# Altium PCB USB-2-RTMI.PcbDoc
Units mil, origin at the board's own origin, x right, y up, seen from the top; angles counter-clockwise.
Board outline 2555 x 900 mil, 2 copper layers (Top Layer, Bottom Layer); 22 components, 25 nets, 113 pads, 16 vias.
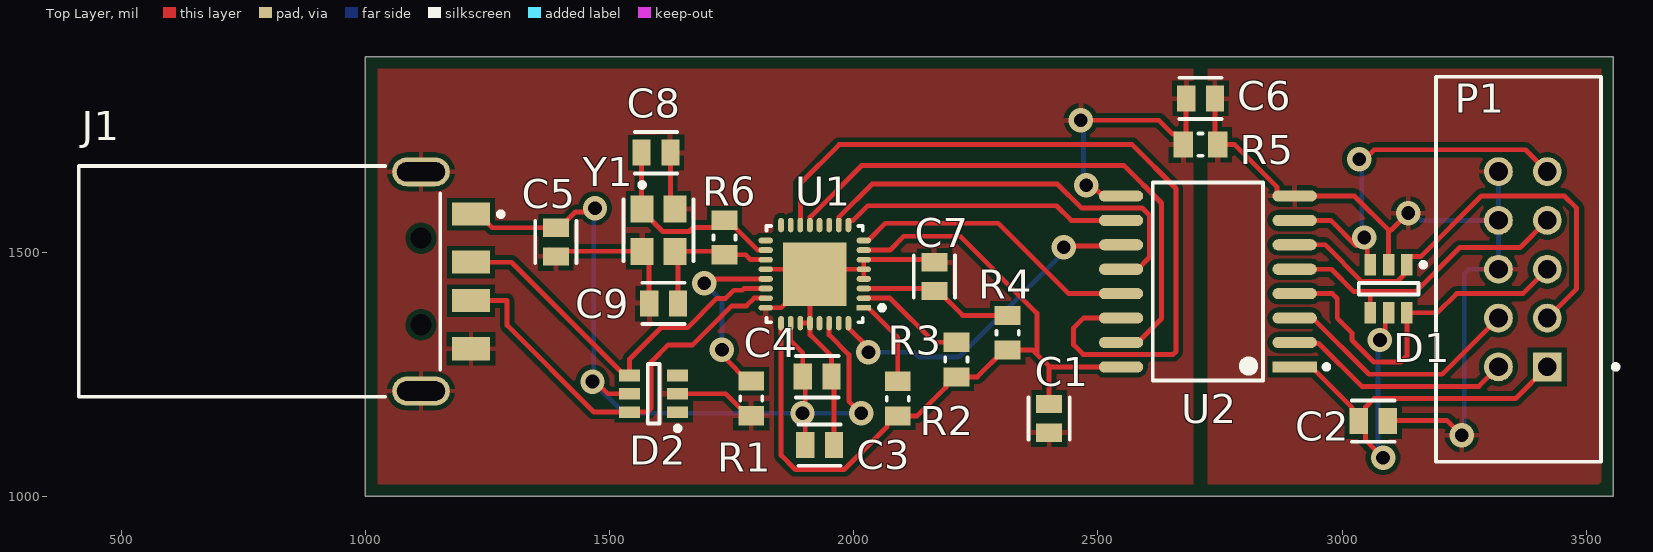
[diagram p0: Top Layer view]
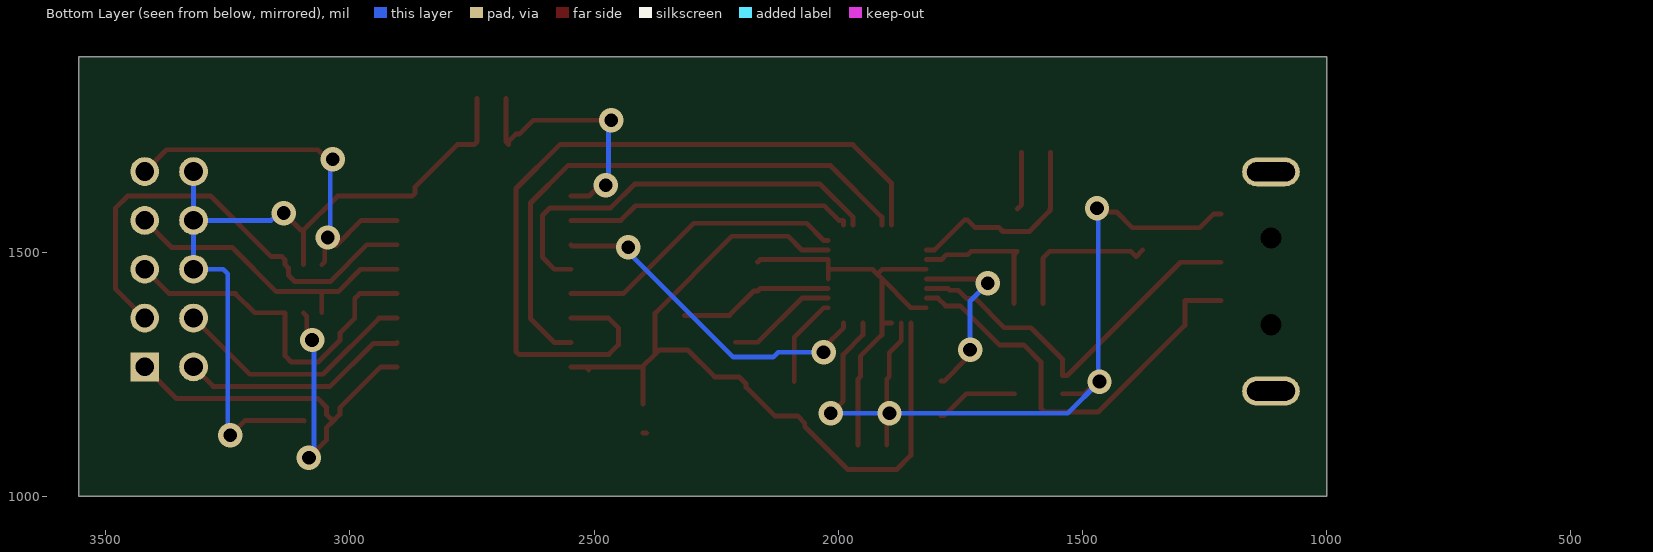
[diagram p1: Bottom Layer view, seen from below]
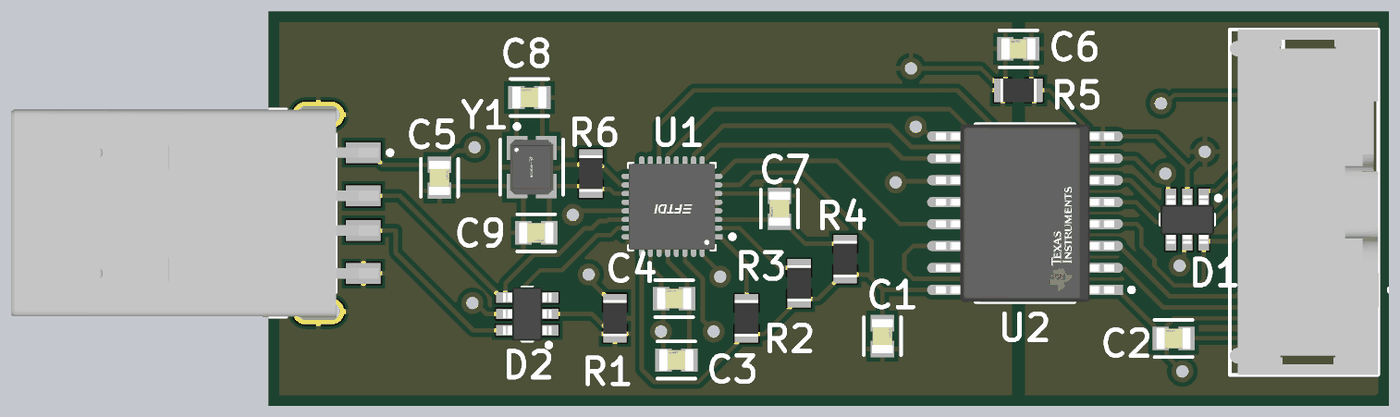
[diagram p2: 3D render of the assembled board from above, using the file's embedded part models]

## Layer stack, top to bottom
Top Solder: solder mask 0.4, Solder Resist, Dk 3.5
Top Layer: signal copper 1.4
Dielectric 1: dielectric 12.6, FR-4, Dk 4.8
Bottom Layer: signal copper 1.4
Bottom Solder: solder mask 0.4, Solder Resist, Dk 3.5

## Board outline
1000,1000 1000,1900 3555,1900 3555,1000

## Design rules (kind name [scope] priority, off if disabled: settings)
Clearance [All] p1: gap=10 ignorepadtopadclearanceinfootprint=TRUE except(0: Arc-Hole Track-Hole SMDPad-Hole THPad-Hole Via-Hole Fill-Hole Poly-Hole Region-Hole Text-Hole; 8: Arc-Arc Arc-Track Arc-SMDPad Track-Track Track-SMDPad SMDPad-SMDPad)
PolygonConnect [All] p1: connectstyle=Relief reliefconductorwidth=10 reliefentries=4 polygonreliefangle="90 Angle" airgapwidth=10
RoutingVias [All] p1: holewidth=28 width=50 viastyle="Through Hole" minholewidth=28 minwidth=50 maxholewidth=28 maxwidth=50
SolderMaskExpansion [All] p1: expansion=4 istentingtop=FALSE
Width [All] p1: maxlimit=10 minlimit=10 preferedwidth=10
30 further rules are at their usual default settings.

## Components (designator, comment, footprint, x,y, rotation, side; value= is the part's Value field where it differs from the comment)
C1 "100nF" FP-C0805C-DN-MFG 2400,1159.53 r270 top value="0.10 μF"
C2 "100nF" FP-C0805C-DN-MFG 3063.7,1154.17 r0 top value="0.10 μF"
C3 "100nF" FP-C0805C-DN-MFG 1930,1105 r0 top value="0.10 μF"
C4 "4.7uF" FP-C0805C-DN-MFG 1925,1245 r0 top value="0.10 μF"
C5 "10nF" FP-C0805C-DN-MFG 1390,1520.47 r270 top value="0.10 μF"
C6 "100nF" FP-C0805C-DN-MFG 2710,1814.66 r0 top value="0.10 μF"
C7 "470nF" FP-C0805C-DN-MFG 2165,1450 r90 top value="0.10 μF"
C8 "12p" FP-C0805C-DN-MFG 1595,1703.63 r0 top value="0.10 μF"
C9 "12p" FP-C0805C-DN-MFG 1610.47,1395 r180 top value="0.10 μF"
D1 "RClamp0504S.TCT" SEMT-SOT-23-6_V 3095,1425 r270 top
D2 "RClamp0504S.TCT" SEMT-SOT-23-6_V 1590,1210 r180 top
J1 "480-37-1000" MOLX-480-37-1000_V 1165,1440 r270 top
P1 "N2510-6002RB" 3M-N2510-6002-10_V 3370,1465 r90 top
R1 "12k" RESC2013X60X35NL10T20 1790,1200.43 r90 top
R2 "10k" RESC2013X60X35NL10T20 2090,1200 r270 top
R3 "10k" RESC2013X60X35NL10T20 2210,1280 r270 top
R4 "47k" RESC2013X60X35NL10T20 2315,1335 r270 top
R5 "1M" RESC2013X60X35NL10T20 2710,1720 r0 top
R6 "1M" RESC2013X60X35NL10T20 1735,1530 r270 top
U1 "FT4222HQ-D-R" FP-VQFN-32-MFG 1920,1455 r180 top
U2 "ISO6761DWR" FP-DW0016A-IPC_B 2725,1440 r180 top
Y1 "ABM8G-12.000MHZ-18-D2Y-T" FP-ABM8G-MFG 1600,1545 r270 top

## Footprints (in the part's own frame and the unit in brackets; to place one, negate y for a bottom-side part, rotate by r counter-clockwise, add the part's x,y. Pads: shape width x height; smd on the part's side, far side on the other; paste and mask are expansions set on the pad)
3M-N2510-6002-10_V [mm] "Header, 10-Leads, Body 20.02x8.59mm, Pitch 2.54mm"
  rect 1.5x1.5 hole 0.97: 1(-5.08,-1.27)
  round 1.5 hole 0.97: 2(-5.08,1.27) 3(-2.54,-1.27) 4(-2.54,1.27) 5(0,-1.27) 6(0,1.27) 7(2.54,-1.27) 8(2.54,1.27) 9(5.08,-1.27) 10(5.08,1.27)
  silkscreen extent -10.01,-4.95 10.01,4.52, body extent -10.01,-4.11 10.01,4.52, height 9.92
FP-ABM8G-MFG [mm]
  rect 1.4x1.2 smd paste+0 mask+0: 1(-1.1,-0.85) 2(1.1,-0.85) 3(1.1,0.85) 4(-1.1,0.85)
  silkscreen extent -2.47,-1.82 1.6,1.82, body extent -1.9,-1.55 1.9,1.55, height 0.25
FP-C0805C-DN-MFG [mm]
  rect 0.95x1.35 smd paste+0 mask+0: 1(-0.75,0) 2(0.75,0)
  silkscreen extent -1.1,-1.07 1.1,1.07, body extent -1.4,-0.85 1.4,0.85, height 0.25
FP-DW0016A-IPC_B [mil]
  rect 90.66x22.92 smd paste+0 mask+0: 1(-177.78,175)
  rrect100% 90.66x22.92 smd paste+0 mask+0: 2(-177.78,125) 3(-177.78,75) 4(-177.78,25) 5(-177.78,-25) 6(-177.78,-75) 7(-177.78,-125) 8(-177.78,-175) 9(177.78,-175) 10(177.78,-125) 11(177.78,-75) 12(177.78,-25) 13(177.78,25) 14(177.78,75) 15(177.78,125) 16(177.78,175)
  silkscreen extent -248,-203 113,203, body extent -233,-213 233,213, height 10
FP-VQFN-32-MFG [mm]
  rect 0.75x0.3 smd paste+0 mask+0: 1(-2.55,1.75)
  rrect100% 0.75x0.3 smd paste+0 mask+0: 2(-2.55,1.25) 3(-2.55,0.75) 4(-2.55,0.25) 5(-2.55,-0.25) 6(-2.55,-0.75) 7(-2.55,-1.25) 8(-2.55,-1.75) 17(2.55,-1.75) 18(2.55,-1.25) 19(2.55,-0.75) 20(2.55,-0.25) 21(2.55,0.25) 22(2.55,0.75) 23(2.55,1.25) 24(2.55,1.75)
  rrect100% 0.3x0.75 smd paste+0 mask+0: 9(-1.75,-2.55) 10(-1.25,-2.55) 11(-0.75,-2.55) 12(-0.25,-2.55) 13(0.25,-2.55) 14(0.75,-2.55) 15(1.25,-2.55) 16(1.75,-2.55) 25(1.75,2.55) 26(1.25,2.55) 27(0.75,2.55) 28(0.25,2.55) 29(-0.25,2.55) 30(-0.75,2.55) 31(-1.25,2.55) 32(-1.75,2.55)
  rect 3.3x3.3 smd paste+0 mask+0: 33(0,0)
  silkscreen extent -3.63,-2.5 2.5,2.5, body extent -3.03,-3.03 3.03,3.03, height 0.25
MOLX-480-37-1000_V [mm] "CONN, 4-Leads, Body 12x18.8mm"
  rect 1.2x2 smd: 1(-3.5,1.3) 2(-1,1.3) 3(1,1.3) 4(3.5,1.3)
  oval 1.5x3 hole 1 slot 2.5 at 90 deg: 5(-5.7,-1.3) 6(5.7,-1.3)
  round 0.5 hole 1.1 unplated: MH1(-2.25,-1.3) MH2(2.25,-1.3)
  silkscreen extent -6,-19.1 6,2.98, body extent -6.35,-19.08 6.35,2.2, height 3.07
RESC2013X60X35NL10T20 [mm] "Chip Resistor, 2-Leads, Body 2.1x1.35mm, IPC Medium Density"
  rect 1x1.35 smd: 1(-0.9,0) 2(0.9,0)
  silkscreen extent -0.1,-0.58 0.1,0.58, body extent -1.05,-0.68 1.05,0.67, height 0.6
SEMT-SOT-23-6_V [mm] "SOT23, 6-Leads, Body 3.1x1.75mm, Pitch 0.95mm"
  rect 1.1x0.6 smd: 1(-1.25,0.95) 2(-1.25,0) 3(-1.25,-0.95) 4(1.25,-0.95) 5(1.25,0) 6(1.25,0.95)
  silkscreen extent -1.37,-1.55 0.3,1.93, body extent -1.4,-1.55 1.4,1.55, height 1.45

## Part data
C1 C2 C3 C4 C5 C6 C7 C8 C9: library part CMP-2007-00279-2, "CAP CER 0.1UF 50V X7R 0805", Capacitance="0.10 μF", Manufacturer=KEMET, Manufacturer Part Number=C0805C104K5RACTU, Package=C0805C-DN, Temperature="-55°C to +125°C", Temperature Characteristic=X7R, Temperature Coefficient=30ppm/°C, Temperature Range High=+125°C, Temperature Range Low=-55°C, Tolerance=0.1, Voltage Rating="50 V", Automotive=No, Category=Cap, ComponentLink2Description=Datasheet, ComponentLink2URL=https://content.kemet.com/datasheets/KEM_C1003_C0G_SMD.pdf, Device Class L1="Passive Components", Device Class L2=Capacitors, Device Class L3="Ceramic Capacitors", Digikey Description="CAP CER 0.1UF 50V X7R 0805", Height=0.88mm, Ipc Land Pattern Name=CAPC200125X78, Lead Free=Yes, Material=Ceramic, Mouser Description="Cap Ceramic 0.1uF 50V X7R 10% SMD 2.0 x 1.2 mm 125 C Paper T/R", Octopart=https://octopart.com/c0805c104k5ractu-kemet-143926, RoHS=TRUE
D1 D2: library part CMP-2000-06976-1, "RailClamp@ Low Capacitance TVS Array, 5 V VRWM, -55 to 125 degC, 6-Pin SOT-23, RoHS, Tape and Reel", Capacitance Value=3pF, Clamping Voltage=25V, Leakage Current=3uA, Manufacturer=Semtech, Operating Temp Range=-55Cto125C, Operating Temperature Classification=Military, Operating Temperature Max Deg. C=125C, Operating Temperature Min Deg. C=-55C, Package / Case=SOT-23, Package Description="6-Pin Small Outline Transistor, Body 2.95 x 1.625 mm, Pitch 0.95 mm", Package Reference=SOT-23-6, Peak Pulse Current=6A, Peak Pulse Power Dissipation=150W, Reverse Breakdown Voltage=6V, Reverse Stand-off Voltage=5V, Test Current (It)=1mA, Clamping Voltage (Max)=25V, Configuration=Quad, Datasheet URL=http://www.semtech.com/images/datasheet/rclamp0504s.pdf, Datasheet Version=01/2008, Direction Type=Uni-Directional, Leakage Current (Max)=3uA, Manufacturer URL=http://www.semtech.com/, Mounting=SurfaceMount, Mounting Style=SurfaceMount, Mounting Technology=SurfaceMount, Number of  Elements=1, Packaging=TapeandReel, Pin Count=6, Polarity=Uni-Directional, Product Depth (mm)=1.6mm, Product Height (mm)=1.15mm, Product Length (mm)=2.9mm, Rad Hardened=No, Suppressor Type=DiodeArrays, Working Voltage=5V, Working Voltage (Max)=5V
J1: library part CMP-1676-00005-1, "Universal Serial Bus (USB) Shielded I/O Plug, Type A, Right Angle Connector, 1.5 A, -20 to 85 degC, 4-Pin SMD, RoHS, Tray", Case Code (Imperial)=0603, Case Code (Metric)=1608, Max Operating Temperature="155 degC", Min Operating Temperature="-55 degC", Package Quantity=5000, Power Rating="100 mW", Resistance="1 mohm", Tolerance=1%, Voltage Rating="50 V", Case\Package=0603, ComponentLink1Description="Manufacturer URL", ComponentLink1URL=http://www.molex.com/, ComponentLink2Description=Datasheet, ComponentLink2URL=http://www.molex.com/pdm_docs/sd/480371000_sd.pdf, DatasheetVersion="Rev. D, 06/2004", Height="0.45 mm", Length="1.6 mm", Mount="Surface Mount", PackageDescription="4-Pin Surface Mount Device, Body 12 x 18.8 mm", PackageReference=480-37-1000, Packaging="Tape and Reel", Pins=2, REACH SVHC="No SVHC", RoHSCompliant=true, Voltage Rating (DC)="50 V", Width="0.8 mm"
P1: library part CMP-2000-06794-1, "Male Header, Pitch 2.54 mm, 2 x 5 Postion, Height 9.91 mm, Tail Length 2.84 mm, -55 to 105 degC, RoHS, Bulk", Manufacturer=3M, Package Description="10-Pin Through Hole Device, Body 20.02 x 8.59 mm, Pitch 2.54 mm", Package Reference=N2510-6002-10, Package Version="Rev. M, 08/2014", PartNumber=N2510, Contact Plating=GoldOverNickel, Datasheet URL=https://datasheet.ciiva.com/11746/0900766b807b18da-11746957.pdf, Datasheet Version=05/2007, Gender=Male, Manufacturer URL=http://www.3m.com/, Mounting Technology=ThroughHole, No. of Positions=10, No. of Rows=2, Number of Contacts=10, Number of Rows=2, Orientation=Straight, Package URL=http://multimedia.3m.com/mws/media/330367O/3mtm-100-in-4-wall-hdr-rohs-lp-straightra-hitemp-ts0770.pdf, Packaging=Rail/Tube, Pitch=2.54mm, Rad Hard=No, Termination Method=Solder, Type=ShroudedHeader
R1 R2 R3 R4 R5 R6: library part CMP-1659-00013-4, "Chip Resistor, 10 KOhm, +/- 1%, 0.125 W, -55 to 155 degC, 0805 (2012 Metric), RoHS, Tape and Reel", Manufacturer=Yageo, Max Operating Temperature="155 degC", Min Operating Temperature="-55 degC", Package Quantity=5000, Voltage Rating="150 V", ComponentLink1Description="Manufacturer URL", ComponentLink1URL=http://www.yageo.com/, ComponentLink2Description=Datasheet, ComponentLink2URL=http://www.yageo.com/documents/recent/PYu-RC_Group_51_RoHS_L_04.pdf, DatasheetVersion="Rev. 4, 02/2016", Height="0.5 mm", Length="2 mm", Mount="Surface Mount", Mounting Technology="Surface Mount", PackageDescription="2-Pin Surface Mounted Device, Body 2 x 1.25 mm", PackageReference=0805, Packaging="Tape and Reel", Pins=2, REACH SVHC="No SVHC", RoHSCompliant=true
U1: library part CMP-194822-000008-1, "IC BRIDGE USB TO I2C/SPI 32VQFN", Case/Package=VQFN, Max Operating Temperature=85°C, Min Operating Temperature=-40°C, Operating Supply Current=78mA, Interface=I2C, Packaging="Tape and Reel"
U2: library part CMP-04872-000227-1, "GENERAL PURPOSE, 50-MBPS, SIX-CH"
Y1: library part CMP-2000-05039-3, "Crystal 12MHz ±20ppm (Tol) ±30ppm (Stability) 18pF FUND 120Ω 4-Pin SMD T/R", Case/Package=CSMD, ESR (Equivalent Series Resistance)=120R, Frequency=12MHz, Frequency Stability=30ppm, Frequency Tolerance=20ppm, Load Capacitance=18pF, Max Operating Temperature=85°C, Min Operating Temperature=-40°C, Operating Frequency="12 MHz", Package Quantity=1000, Depth=2.5mm, Height=1mm, Lead Free="Lead Free", Length=3.2mm, Mount="Surface Mount", Number of Pins=4, Packaging="Tape and Reel", Radiation Hardening=No, Series=ABM8G, Series Resistance=120R, Termination=SMD/SMT, Tolerance=20ppm, Width=2.5mm

## Via types
v1: diameter 50, hole 28, Top Layer to Bottom Layer, tented both sides, 16 vias

## Nets (pads, with @x,y where several pads share a name; then routed paths per layer and width w, separated by ;. In a path a pad name is that pad's centre, name@x,y a point inside that pad or via, vN(x,y) a via of type N, cw(c..) or ccw(c..) an arc to the next point about the centre after c; other vN are vias at no path point)
3.3_EXT: C2.1 D1.5 P1.1 U2.1 | length 1022.3
  Top Layer w10: U2.1 2936.65,1265 3020.47,1181.18 3020.47,1167.87 C2.1 ; v1(3077.31,1320.04) 3077.31,1330.86 3088.19,1341.74 3088.19,1368.97 D1.5 ; v1(3083.7,1079.17) 3047.87,1115 3047.87,1140.47 C2.1 ; P1.1 3355,1200 3065,1200 3047.87,1182.87 3047.87,1167.87 C2.1
  Bottom Layer w10: v1@3070,1085 3073.65,1088.65 3073.65,1316.38 v1(3077.31,1320.04)
+5: C3.1 C4.1 C5.1 D2.5 J1.1 U1.26 U1.30 | length 1782.2
  Top Layer w10: J1.1 1231.93,1577.8 1259.72,1550 C5.1 1397.87,1550 1430.22,1582.35 1462.35,1582.35 v1(1470,1590) ; v1(1465,1235) 1471.57,1235 1496.57,1210 D2.5 ; U1.26 1870.79,1318.26 1895.47,1293.57 C4.1 1900.47,1240 v1@1900.47,1172.5 ; v1(1895,1170) 1897.5,1172.5 v1@1900.47,1172.5 ; C3.1 v1@1900.47,1172.5 ; U1.30 1949.53,1330.47 1990,1290 1990,1195 v1(2015,1170)
  Bottom Layer w10: v1(1470,1590) 1467.5,1587.5 1467.5,1237.5 v1(1465,1235) 1530,1170 v1(1895,1170) v1(2015,1170)
AGND: C2.2 C6.2 D1.2 P1.6 P1.8 P1.10 R5.2 U2.8 | length 1617.3
  Top Layer w10: C6.2 2739.53,1725.91 R5.2 2780.12,1720 2866.43,1633.69 2866.43,1620.97 2872.4,1615 U2.8 3025,1615 3095,1545 ; C2.2 3094.06,1155 3215,1155 v1(3245,1125) ; D1.2 3095,1545 ; v1(3135,1580) 3100,1545 3095,1545 ; P1.6@3317.74,1462.74 P1.6
  Bottom Layer w10: v1(3135,1580) 3145.82,1580 3160.82,1565 P1.8 ; v1(3245,1125) 3250,1130 3250,1455.47 3259.53,1465 P1.6 P1.8 ; P1.10 P1.8
GND: C1.2 C3.2 C4.2 C5.2 C6.1 C7.2 C8.2 C9.2 D2.2 J1.4 J1.5 J1.6 R1.1 R5.1 U1.4 U1.5 U1.6 U1.20 U1.24 U1.27 U1.28 U1.33 U2.9 Y1.2 Y1.4 | length 2062.9
  Top Layer w10: C5.2@1376.3,1504.64 C5.2 1400.75,1501.69 Y1.2 1580.94,1487.28 C9.2 ; C8.2 1624.53,1597.24 Y1.4 ; D2.2 1738.11,1210 1783.11,1165 R1.1 ; U1.24 1851.1,1386.1 U1.33@1910.16,1445.16 ; U1.20 1910.16,1464.84 U1.33 ; U1.27 U1.28 ; C3.2 1959.53,1240 C4.2 1954.53,1286.57 1910.5,1330.6 1910.5,1354.26 U1.28 ; U1.4 U1.5 ; C7.2 2160,1484.53 U1.6 U1.5 ; C1.2@2392.13,1130 C1.2 ; v1(2465,1770) 2624.57,1770 2652.99,1741.57 2659.88,1741.57 2674.57,1726.89 R5.1 2680.47,1725.91 C6.1 ; v1(2476.01,1637) 2483.66,1629.35 2495.51,1629.35 2509.86,1615 U2.9 ; U1.28 U1.33@1910.16,1445.16 ; U1.33@1910.16,1445.16 U1.33 ; U1.33 1929.84,1464.84 U1.5
  Bottom Layer w10: v1(2465,1770) 2470.5,1764.5 2470.5,1642.5 v1(2476.01,1637)
NetC7_1: C7.1 R4.1 U1.3 | length 317.4
  Top Layer w10: U1.3 2160,1425.47 C7.1 2172.87,1420.47 2222.91,1370.43 R4.1
NetC8_1: C8.1 R6.1 U1.18 Y1.1 | length 425.4
  Top Layer w10: C8.1 1565.47,1589.37 Y1.1 1566.54,1584.37 1608.66,1542.25 1662.47,1542.25 1670.97,1550.75 1720.31,1550.75 R6.1 1741.89,1565.43 1802.45,1504.87 1802.45,1504.56 1819.26,1504.56 U1.18
NetC9_1: C9.1 R6.2 U1.19 Y1.3 | length 302.7
  Top Layer w10: C9.1 1640,1495.16 Y1.3 1727.88,1501.69 R6.2 1778.4,1494.57 1788.44,1484.53 U1.19
NetD1_1: D1.1 P1.3 U2.6 | length 955.6
  Top Layer w10: U2.6 2964.96,1515 3040.4,1439.56 3112.2,1439.56 3125.59,1452.95 3125.59,1467.4 D1.1 3132.4,1484.05 3139.21,1490.87 3160.87,1490.87 3285,1615 3455,1615 3480,1590 3480,1425 P1.3
NetD1_3: D1.3 P1.9 U2.7 | length 783.6
  Top Layer w10: U2.7 2976.65,1565 v1@3028.33,1513.33 ; v1(3035,1690) 3045.82,1690 3065.35,1709.53 3375.47,1709.53 P1.9 ; v1(3045,1530) 3051.3,1523.7 3051.3,1480.51 D1.3
  Bottom Layer w10: v1(3035,1690) 3040,1685 3040,1535 v1(3045,1530)
NetD1_4: D1.4 P1.7 U2.5 | length 640
  Top Layer w10: U2.5 2978.23,1465 3023.97,1419.26 3057.6,1419.26 ; D1.4 3057.6,1419.26 ; P1.7 3364.53,1509.53 3240.69,1509.53 3150.42,1419.26 3057.6,1419.26
NetD1_6: D1.6 P1.5 U2.4 | length 737.8
  Top Layer w10: U2.4 2980,1415 2990,1405 2990,1365 3020,1335 3020,1320 3065,1275 3119.73,1275 3132.4,1287.67 D1.6 3195,1375.79 3234.21,1415 3370,1415 P1.5
NetD2_4: D2.4 J1.2 U1.22 | length 792.8
  Top Layer w10: J1.2 1298.98,1479.37 1530.95,1247.4 D2.4 1540.79,1280.79 1605.25,1345.25 1659.75,1345.25 1719.75,1405.25 1737.54,1405.25 1754.17,1421.88 1771.96,1421.88 1775.55,1425.47 U1.22
NetD2_6: D2.6 J1.3 U1.23 | length 879.8
  Top Layer w10: J1.3 1290,1400.63 1290,1350 1467.4,1172.6 D2.6 1577.6,1172.6 1585,1180 1585,1275 1620,1310 1670,1310 1750,1390 1780,1390 1795.79,1405.79 U1.23
NetP1_2: P1.2 U2.2 | length 471.1
  Top Layer w10: U2.2 2904.81,1312.97 2952.03,1312.97 3040,1225 3280,1225 P1.2
NetP1_4: P1.4 U2.3 | length 512.5
  Top Layer w10: U2.3 2940,1365 3055,1250 3205,1250 P1.4
NetR1_2: R1.2 U1.21 | length 373.4
  Top Layer w10: v1(1693.97,1436.03) 1704.79,1436.03 1713.92,1445.16 U1.21 ; v1(1730,1300) 1737.65,1292.35 1737.65,1281.32 1783.11,1235.87 R1.2
  Bottom Layer w10: v1(1693.97,1436.03) 1730,1400 v1(1730,1300)
NetR2_1: R2.1 U1.1 | length 184.7
  Top Layer w10: U1.1 2029.25,1386.1 2090,1325.35 R2.1
NetR3_1: R3.1 U1.2 | length 227
  Top Layer w10: U1.2 2074.21,1405.79 2164.57,1315.43 R3.1
NetU1_8: U1.8 U2.13 | length 601.2
  Top Layer w10: U1.8 2029.25,1523.9 2064.58,1559.23 2295.77,1559.23 2440,1415 U2.13
NetU1_9: U1.9 U2.10 | length 592.1
  Top Layer w10: U1.9 1988.9,1563.76 1989.73,1564.6 1998.1,1564.6 2028.5,1595 2415,1595 2445,1565 U2.10
NetU1_10: U1.10 U2.12 | length 861.3
  Top Layer w10: U1.10 1969.56,1555.74 1969.56,1571.65 2037.37,1639.46 2416.98,1639.46 2465.9,1590.54 2590.14,1590.54 2605.55,1575.13 2605.55,1489.46 2581.1,1465 U2.12
NetU1_13: U1.13 U2.15 | length 1151
  Top Layer w10: U1.13 1910.5,1555.74 1910.5,1571.65 2015.85,1677 2553.69,1677 2630,1600.69 2630,1363.9 2581.1,1315 U2.15
NetU1_14: U1.14 U2.14 | length 1619
  Top Layer w10: U1.14 1890.47,1640.47 1970,1720 2570,1720 2659.68,1630.32 2659.68,1296.4 2653.82,1290.54 2469.46,1290.54 2450,1310 2450,1345 2470,1365 U2.14
NetU1_32: U1.32 U2.11 | length 699.1
  Top Layer w10: U1.32 1988.9,1345.26 2030,1304.16 v1(2030,1295) ; v1(2430,1510) 2432.53,1512.53 2544.75,1512.53 U2.11
  Bottom Layer w10: v1(2030,1295) 2122.91,1295 2132.91,1285 2215,1285 2430,1500 v1(2430,1510)
VCC: C1.1 R2.2 R3.2 R4.2 U1.7 U1.25 U2.16 | length 1698.7
  Top Layer w10: U1.25 1851.1,1083.9 1880,1055 1980.43,1055 2068.43,1142.99 2068.43,1149.88 2083.11,1164.57 R2.2 2130,1164.57 2188.43,1222.99 2188.43,1229.88 2203.11,1244.57 R3.2 2253.11,1244.57 2308.11,1299.57 R4.2 2366.29,1299.57 2375,1290.86 ; U1.7 2074.21,1504.21 2102.5,1532.5 2217.58,1532.5 2375,1375.08 2375,1290.86 ; C1.1 2400,1264.14 2400.86,1265 ; U2.16@2510.88,1258.36 2510.88,1259.03 U2.16@2513.35,1261.5 ; U2.16 2400.86,1265 ; 2375,1290.86 2400.86,1265
pads on no net: D2.1 D2.3 J1.MH1 J1.MH2 U1.11 U1.12 U1.15 U1.16 U1.17 U1.29 U1.31

## Polygon pours and split planes (outlines as drawn)
GND on Top Layer "GND_L01_P000" (solid, remove dead copper, pour order 0): 1025,1875 2695,1875 2695,1025 1025,1025
AGND on Top Layer "AGND_L01_P001" (solid, remove dead copper, pour order 1): 2725.21,1875 3530,1875 3530,1030 3525,1025 2725.21,1025

## Silkscreen, mask and mechanical layers (free items; w line width, h text height)
Mechanical 1:
  the board outline again, w10

## Text inside footprints (layer, text, board x,y; h text height)
J1: Mechanical 1 "PCB EDGE" at 1013.82,1390 h19.68 r270